# Altium PCB EX1.PcbDoc
Units mil, origin at the board's own origin, x right, y up, seen from the top; angles counter-clockwise.
Board outline 3400 x 2650 mil, 2 copper layers (Top Layer, Bottom Layer); 16 components, 19 nets, 91 pads, 14 vias.
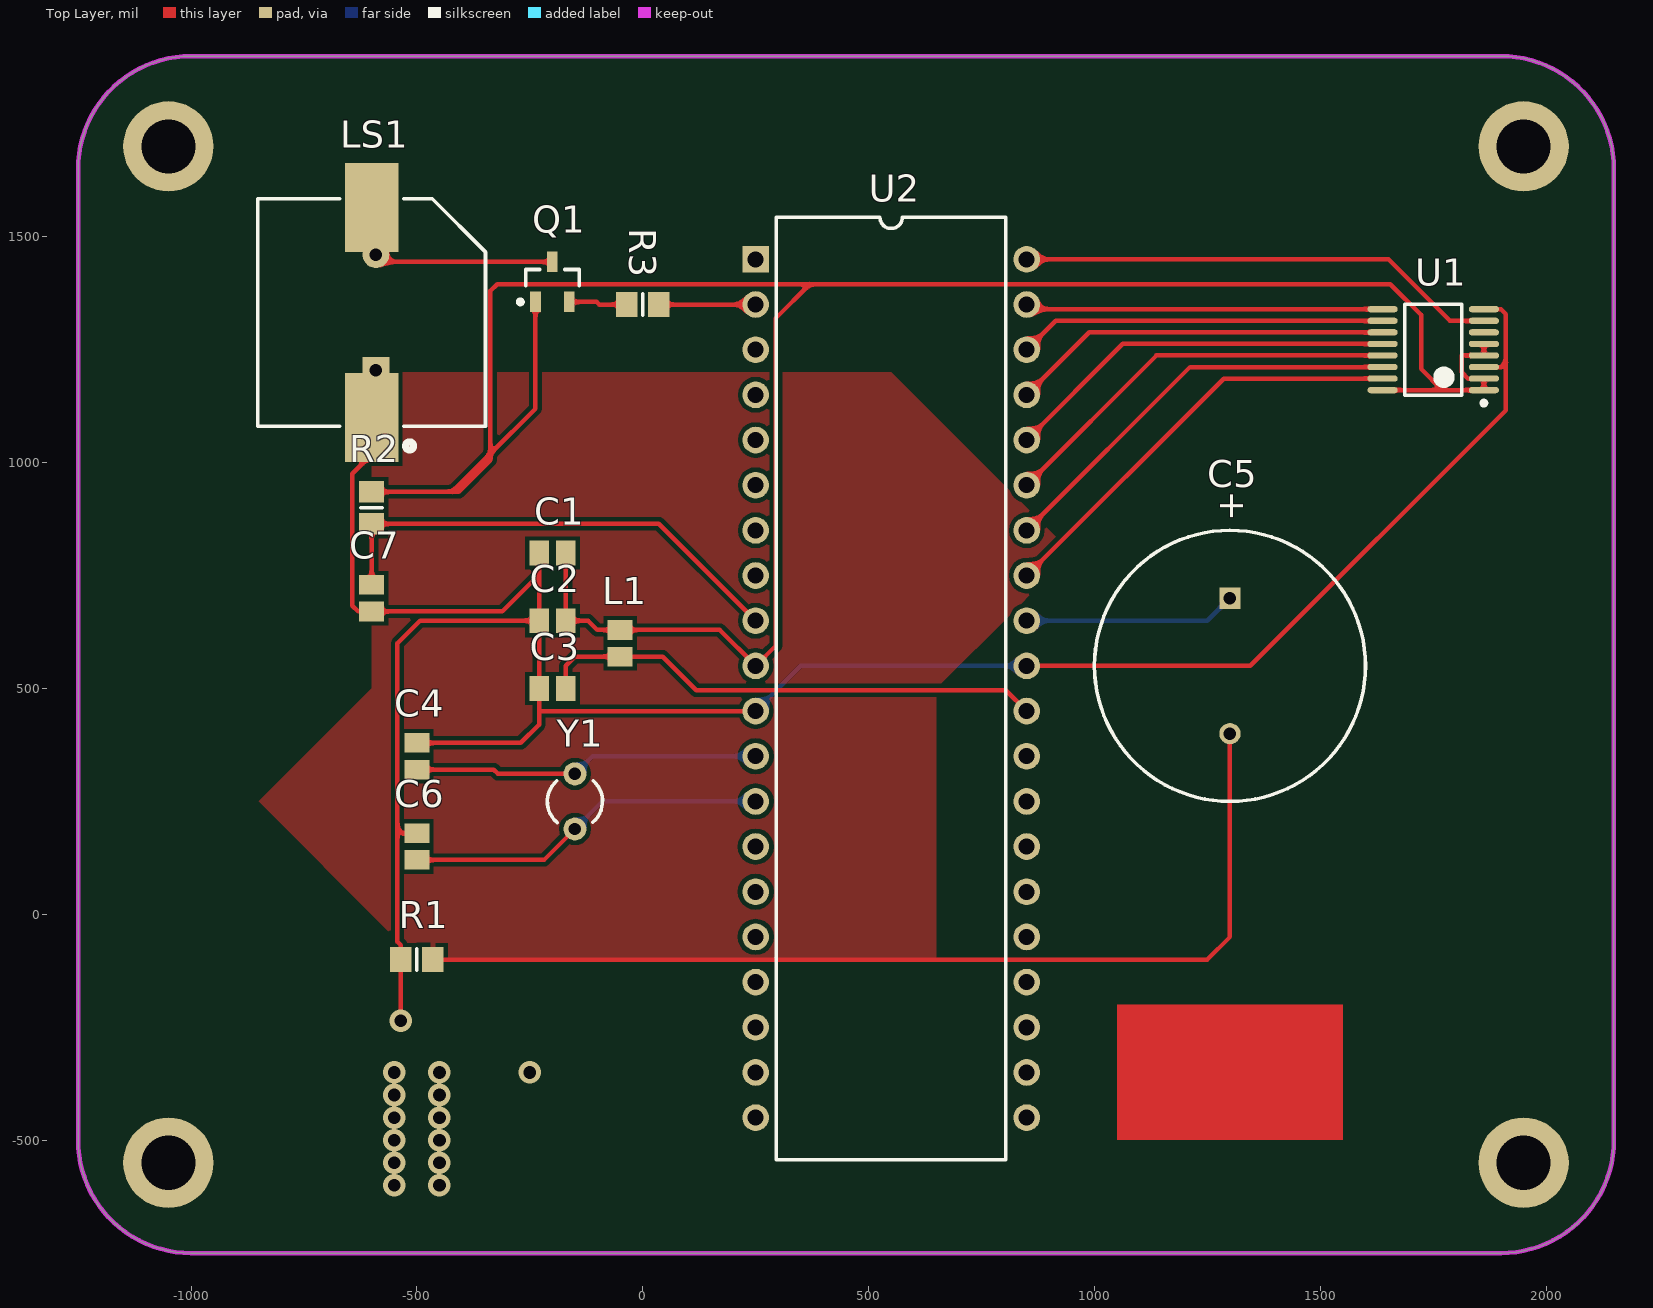
[diagram p0: Top Layer view]
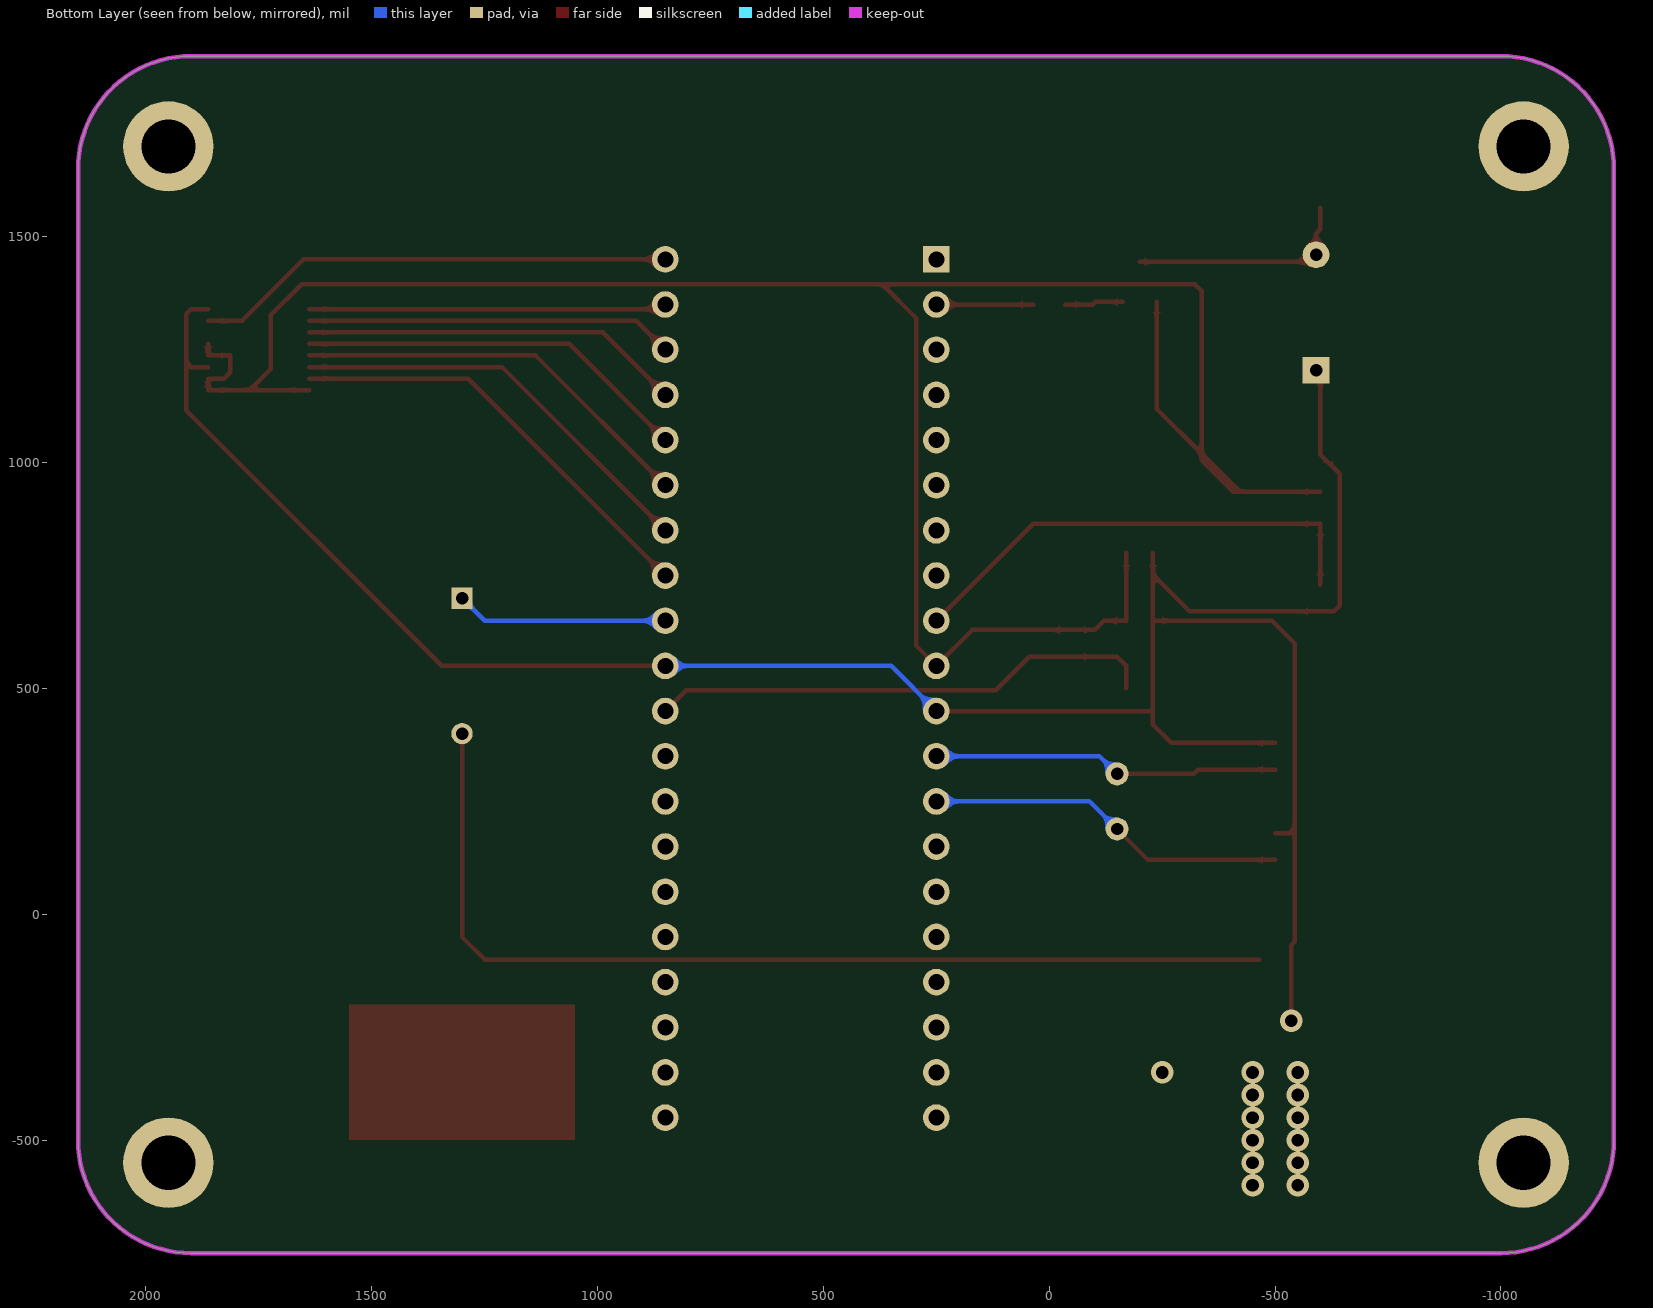
[diagram p1: Bottom Layer view, seen from below]

## Layer stack, top to bottom
Top Solder: solder mask 0.4, Solder Resist, Dk 3.5
Top Layer: signal copper 1.4
Dielectric 1: dielectric 12.6, FR-4, Dk 4.8
Bottom Layer: signal copper 1.4
Bottom Solder: solder mask 0.4, Solder Resist, Dk 3.5

## Board outline
-1250,-500 -1250,1650 cw(c-1000,1650) -1000,1900 1900,1900 cw(c1900,1650) 2150,1650 2150,-500 cw(c1900,-500) 1900,-750 -1000,-750 cw(c-1000,-500)

## Design rules (kind name [scope] priority, off if disabled: settings)
Clearance [All] p1: gap=10
PolygonConnect [All] p1: connectstyle=Relief reliefconductorwidth=10 reliefentries=4 polygonreliefangle="90 Angle" airgapwidth=10
RoutingVias "Schematic Routing Via Style" [InNet('NetQ1_2')] p1: holewidth=28 width=50 viastyle="Through Hole" minholewidth=28 minwidth=30 maxholewidth=28 maxwidth=50
RoutingVias [All] p2: holewidth=28 width=50 viastyle="Through Hole" minholewidth=28 minwidth=50 maxholewidth=28 maxwidth=50
SolderMaskExpansion [All] p1: expansion=4
Width [All] p1: maxlimit=10 minlimit=10 preferedwidth=10
30 further rules are at their usual default settings.

## Classes and differential pairs
net class DATABUS[0..7]: DATABUS0 DATABUS1 DATABUS2 DATABUS3 DATABUS4 DATABUS5 DATABUS6 DATABUS7
component class EX1: C1 C2 C3 C4 C5 C6 L1 LS1 Q1 R1 R2 R3 U1 U2 Y1

## Components (designator, comment, footprint, x,y, rotation, side; value= is the part's Value field where it differs from the comment)
C1 "Cap" C0805 -200,800 r0 top
C2 "Cap" C0805 -200,650 r0 top
C3 "Cap" C0805 -200,500 r0 top
C4 "Cap" C0805 -500,350 r270 top
C5 "Cap Pol1" RB7.6-15 1300,550 r90 top
C6 "Cap" C0805 -500,150 r90 top
C7 "Cap" C0805 -600,700 r270 top
L1 "Inductor" C0805 -50,600 r270 top
LS1 "Buzzer" ABSM-1574 -600,1100 r90 top
Q1 "QNPN" SOT-23B_N -200,1400 r90 top
R1 "Res2" 6-0805_N -500,-100 r0 top
R2 "Res2" 6-0805_N -600,900 r90 top
R3 "Res2" 6-0805_N 0,1350 r0 top
U1 "ADC-8" SOT403-1_N 1750,1250 r180 top
U2 "ATmega16L-8PI" 40P6 550,500 r270 top
Y1 "XTAL" R38 -150,250 r0 top

## Footprints (in the part's own frame and the unit in brackets; to place one, negate y for a bottom-side part, rotate by r counter-clockwise, add the part's x,y. Pads: shape width x height; smd on the part's side, far side on the other; paste and mask are expansions set on the pad)
6-0805_N [mm] "Chip Resistor, Body 2.0x1.2mm, IPC Medium Density"
  rect 1.2x1.4 smd: 1(-0.9,0) 2(0.9,0)
  silkscreen extent 0,-0.6 0,0.6, body extent -1.07,-0.7 1.07,0.7, height 0.7
40P6 [mm] "DIP; 40 Leads; Row Spacing 15.24 mm; Pitch 2.54 mm"
  rect 1.5x1.5 hole 0.9: 1(-24.13,-7.62)
  round 1.5 hole 0.9: 2(-21.59,-7.62) 3(-19.05,-7.62) 4(-16.51,-7.62) 5(-13.97,-7.62) 6(-11.43,-7.62) 7(-8.89,-7.62) 8(-6.35,-7.62) 9(-3.81,-7.62) 10(-1.27,-7.62) 11(1.27,-7.62) 12(3.81,-7.62) 13(6.35,-7.62) 14(8.89,-7.62) 15(11.43,-7.62) 16(13.97,-7.62) 17(16.51,-7.62) 18(19.05,-7.62) 19(21.59,-7.62) 20(24.13,-7.62) 21(24.13,7.62) 22(21.59,7.62) 23(19.05,7.62) 24(16.51,7.62) 25(13.97,7.62) 26(11.43,7.62) 27(8.89,7.62) 28(6.35,7.62) 29(3.81,7.62) 30(1.27,7.62) 31(-1.27,7.62) 32(-3.81,7.62) 33(-6.35,7.62) 34(-8.89,7.62) 35(-11.43,7.62) 36(-13.97,7.62) 37(-16.51,7.62) 38(-19.05,7.62) 39(-21.59,7.62) 40(-24.13,7.62)
  silkscreen extent -26.5,-6.45 26.5,6.45
ABSM-1574 [mm] "Magnetic Transducer Buzzer"
  rect 5x3 smd: 1(0,0) 2(11.8,0)
  rect 1.5x1.5 hole 0.7: 1A(2.65,-0.24)
  round 1.5 hole 0.7: 2A(9.15,-0.24)
  silkscreen extent -1.83,-6.4 12.3,6.4
C0805 [mm] "Chip Capacitor, Body 2.0x1.3mm, IPC High Density"
  rect 1.1x1.4 smd: 1(-0.75,0) 2(0.75,0)
  body extent -1.1,-0.72 1.1,0.72, height 1.4
R38 [mm] "Crystal, Thru-Hole; 2 Leads; Body 3.1 x 8.2 mm (Dia.xH)"
  round 1.3 hole 0.7: 1(0,1.55) 2(0,-1.55)
  silkscreen extent -1.55,-1.19 1.55,1.17
RB7.6-15 [mm] "Polarized Capacitor (Radial); 2 Leads"
  rect 1.2x1.2 hole 0.7: 1(3.81,0)
  round 1.2 hole 0.7: 2(-3.81,0)
  silkscreen extent -7.62,-7.62 7.62,7.62
SOT403-1_N [mm] "TSOP, 16-Leads, Body 5x4.4mm, Pitch 0.65mm, IPC Medium Density"
  oval 1.7x0.35 smd: 1(-2.85,2.275) 2(-2.85,1.625) 3(-2.85,0.975) 4(-2.85,0.325) 5(-2.85,-0.325) 6(-2.85,-0.975) 7(-2.85,-1.625) 8(-2.85,-2.275) 9(2.85,-2.275) 10(2.85,-1.625) 11(2.85,-0.975) 12(2.85,-0.325) 13(2.85,0.325) 14(2.85,0.975) 15(2.85,1.625) 16(2.85,2.275)
  silkscreen extent -2.98,-2.55 1.6,3.12, body extent -2.25,-2.55 2.25,2.55, height 1.1
SOT-23B_N [mm] "SOT23, 3-Leads, Body 2.9x1.3mm, Pitch 0.95mm, Lead Span 2.4mm, IPC Medium Density"
  rect 1.15x0.6 smd: 1(-1.125,0.95) 2(-1.125,-0.95) 3(1.125,0)
  silkscreen extent -1.25,-1.5 0.7,1.92, body extent -0.7,-1.5 0.7,1.5, height 1.14

## Part data
C1 C2 C3 C4 C6 C7: "Capacitor"
C5: "Polarized Capacitor (Radial)"
LS1: "Magnetic Transducer Buzzer"
Q1: "NPN Bipolar Transistor"
R1 R2 R3: "Resistor"
U1: "Generic 8-Bit A/D Converter"
U2: "8-Bit AVR Microcontroller with 16K Bytes of In-System Programmable Flash Memory"
Y1: "Crystal Oscillator"

## Free pads (board coordinates)
  round 200 hole 120: 2(-1050,-550) 2(-1050,1700) 2(1950,-550) 2(1950,1700)

## Via types
v1: diameter 50, hole 28, Top Layer to Bottom Layer, 14 vias

## Nets (pads, with @x,y where several pads share a name; then routed paths per layer and width w, separated by ;. In a path a pad name is that pad's centre, name@x,y a point inside that pad or via, vN(x,y) a via of type N, cw(c..) or ccw(c..) an arc to the next point about the centre after c; other vN are vias at no path point)
AGND: C5.2 R1.2 | length 2235.3
  Top Layer w10: R1.2 1250,-100 1300,-50 C5.2
AVCC: C3.2 L1.2 U2.30 | length 1128.9
  Top Layer w10: C3.2 -170.47,550 -150,570.47 L1.2 44,570.47 118.47,496 804,496 U2.30
DATABUS0: U1.7 U2.40 | length 1068.5
  Top Layer w10: U2.40 1650.98,1450 1787,1313.98 U1.7
DATABUS1: U1.9 U2.39 | length 792.1
  Top Layer w10: U2.39 860.43,1339.57 U1.9
DATABUS2: U1.10 U2.38 | length 814.3
  Top Layer w10: U2.38 913.98,1313.98 U1.10
DATABUS3: U1.11 U2.37 | length 845.1
  Top Layer w10: U2.37 988.39,1288.39 U1.11
DATABUS4: U1.12 U2.36 | length 875.9
  Top Layer w10: U2.36 1062.8,1262.8 U1.12
DATABUS5: U1.13 U2.35 | length 906.8
  Top Layer w10: U2.35 1137.2,1237.2 U1.13
DATABUS6: U1.14 U2.34 | length 937.6
  Top Layer w10: U2.34 1211.61,1211.61 U1.14
DATABUS7: U1.15 U2.33 | length 968.4
  Top Layer w10: U2.33 1286.02,1186.02 U1.15
GND: C1.1 C2.1 C3.1 C4.1 C6.2 C7.2 LS1.1 LS1.1A R1.1 U1.3 U1.8 U2.11 U2.31 | length 5623.7
  Top Layer w10: LS1.1A -600,1204.33 LS1.1 -600,1018 -643,975 -643,683.47 -630,670.47 C7.2 -311.06,670.47 -229.53,752 ; v1(-535.43,-235.43) R1.1 -535.43,-68 -543,-60.43 -543,190 ; C6.2 -532.53,179.53 -543,190 ; C4.1 -270,379.53 -229.53,420 -229.53,450 ; C1.1 -229.53,752 ; U2.11 -229.53,450 ; U2.31 1345,550 1911,1116 1911,1222.61 ; U1.3 1900,1211.61 1911,1222.61 ; U1.8 1900,1339.57 1911,1328.57 1911,1222.61 ; -543,190 -543,600 -493,650 C2.1 ; -229.53,450 C3.1 C2.1 ; C2.1 -229.53,752
  Bottom Layer w10: U2.11 350,550 U2.31
NetC4_2: C4.2 U2.12 Y1.1 | length 770.1
  Top Layer w10: C4.2 -330,320.47 -320.55,311.02 Y1.1
  Bottom Layer w10: Y1.1 -111.02,350 U2.12
NetC5_1: C5.1 U2.32 | length 470.7
  Bottom Layer w10: U2.32 1250,650 C5.1
NetC6_1: C6.1 U2.13 Y1.2 | length 803.7
  Top Layer w10: C6.1 -218.5,120.47 Y1.2
  Bottom Layer w10: Y1.2 -88.98,250 U2.13
NetLS1_2: LS1.2 LS1.2A Q1.3 | length 505.4
  Top Layer w10: LS1.2 -600,1516.45 -590.55,1507 LS1.2A -574.61,1444.29 Q1.3
NetQ1_2: Q1.2 R3.1 | length 129.5
  Top Layer w10: Q1.2 -102,1355.71 -96.29,1350 R3.1
NetR3_2: R3.2 U2.2 | length 214.6
  Top Layer w10: R3.2 U2.2
RESET: C7.1 R2.1 U2.9 | length 1073.9
  Top Layer w10: C7.1 R2.1 35.43,864.57 U2.9
VCC5: C1.2 C2.2 L1.1 Q1.1 R2.2 U1.1 U1.2 U1.4 U1.5 U1.16 U2.10 | length 5367
  Top Layer w10: R2.2 -421.57,935.43 ; Q1.1 -237.4,1119.6 -337.4,1019.6 ; C1.2 C2.2 -121,650 -100.53,629.53 L1.1 170.47,629.53 U2.10 295,595 295,1320 370,1395 ; U1.16 1770,1160.43 ; U1.5 U1.4 1813,1237.2 1813,1200 1826.98,1186.02 U1.2 U1.1 1770,1160.43 ; -421.57,935.43 -407.57,935.43 -337.4,1005.6 -337.4,1019.6 ; -421.57,935.43 -337.4,1019.6 ; -337.4,1019.6 -337.4,1380 -322.4,1395 370,1395 ; 370,1395 1655,1395 1723,1327 1723,1207.43 1770,1160.43
pads on no net: U1.6 U2.1 U2.3 U2.4 U2.5 U2.6 U2.7 U2.8 U2.14 U2.15 U2.16 U2.17 U2.18 U2.19 U2.20 U2.21 U2.22 U2.23 U2.24 U2.25 U2.26 U2.27 U2.28 U2.29
copper on no net:
  other v1: -550,-600 -450,-600 -550,-550 -450,-550 -550,-500 -450,-500 -550,-450 -450,-450 -550,-400 -450,-400 -550,-350 -450,-350 -250,-350

## Polygon pours and split planes (outlines as drawn)
AGND on Top Layer "GND" (solid, pour order 22): -600,1200 550,1200 950,800 650,500 650,-100 -500,-100 -850,250 -600,500 -600,1200

## Keep-outs
Keep-Out Layer:
  the board outline again, w10

## Other copper
Top Layer:
  rectangle: 1050,-500 1550,-200

## Dimensions
-1250,-950 to 2150,-950 on Top Overlay
2350,-750 to 2400,1900 on Top Overlay

## Text inside footprints (layer, text, board x,y; h text height)
C5: Top Overlay "+" at 1329.01,870.15 h59.06 r90